# EAGLE board DSP HUB75 and Audio (EAGLE 9.6.2)

Size 160 x 100 mm. Coordinates in mm from the lower left corner, seen from the top.
Outline: 0,0 160,0 160,100 0,100 0,0
Copper layers (1*16): Top 0.035mm / dielectric 1.5mm / Bottom 0.035mm
Design rules "default": minimum track width 6mil, minimum drill 0.35mm, track to track 6mil, track to pad 6mil, pad to pad 6mil, via to via 6mil, smd to smd 6mil, copper to edge 40mil, drill to drill 6mil, minimum pad ring 10mil, minimum via ring 8mil, stop-mask expansion 4mil, vias tented up to drill 0mil, thermal gap 10mil
Net classes: 0 default: width 0.254 mm; 1 power: width 0.406 mm

## Footprints (pad centres in the part's own frame; a part is rotated, then mirrored left to right if it is on the bottom)
E1,8-4 = drill 0.711 pad 1.168: + -0.889,0 | drill 0.711 pad 1.168 octagon: - 0.889,0
2X08 = drill 1.016 square: 1 -8.89,-1.27 | drill 1.016 octagon: 2 -8.89,1.27; 3 -6.35,-1.27; 4 -6.35,1.27; 5 -3.81,-1.27; 6 -3.81,1.27; 7 -1.27,-1.27; 8 -1.27,1.27; 9 1.27,-1.27; 10 1.27,1.27; 11 3.81,-1.27; 12 3.81,1.27; 13 6.35,-1.27; 14 6.35,1.27; 15 8.89,-1.27; 16 8.89,1.27
0207/10 = drill 0.813 octagon: 1 -5.08,0; 2 5.08,0
TEENSY_3.0-3.2&LC_DIL = drill 0.965: 0 -7.62,13.97; 1 -7.62,11.43; 2 -7.62,8.89; 3 -7.62,6.35; 3.3V 7.62,11.43; 4 -7.62,3.81; 5 -7.62,1.27; 6 -7.62,-1.27; 7 -7.62,-3.81; 8 -7.62,-6.35; 9 -7.62,-8.89; 10 -7.62,-11.43; 11 -7.62,-13.97; 12 -7.62,-16.51; 13 7.62,-16.51; 14/A0 7.62,-13.97; 15/A1 7.62,-11.43; 16/A2 7.62,-8.89; 17/A3 7.62,-6.35; 18/A4 7.62,-3.81; 19/A5 7.62,-1.27; 20/A6 7.62,1.27; 21/A7 7.62,3.81; 22/A8 7.62,6.35; 23/A9 7.62,8.89; AGND 7.62,13.97; GND -7.62,16.51; VIN 7.62,16.51

## Placement (x,y rotation side)
C1  10uF  [E1,8-4]  63.5,39.37 0 top
C2  10uF  [E1,8-4]  53.34,30.48 90 top
JP4  [2X08]  35.56,17.78 180 top
R1  1k  [0207/10]  35.56,43.18 90 top
R2  47k  [0207/10]  64.77,30.48 90 top
R3  47k  [0207/10]  62.23,30.48 90 top
R4  10k  [0207/10]  59.69,30.48 90 top
R5  2.2k  [0207/10]  57.15,30.48 90 top
U$1  TEENSY_3.1-3.2_DIL  [TEENSY_3.0-3.2&LC_DIL]  35.56,41.91 0 top

## Library data of the parts
C1 C2 = rcl; SPICEPREFIX: C
JP4 = pinhead-2
R1-R5 = rcl; SPICEPREFIX: R
U$1 = Teensy_3_and_LC_Series_Boards_v1.4

## Nets
3.3V: U$1.3.3V
+3V3: R4.2 U$1.VIN
AGND: U$1.AGND
AUDIO_IN: C1.- R2.2
FFT: C1.+ R3.2 U$1.16/A2
GND [power]: C2.- JP4.4 JP4.8 JP4.16 R2.1 R5.1 U$1.GND
N$1: R1.2 U$1.3
N$2: C2.+ R3.1 R4.1 R5.2
PANEL_ADX0: JP4.9 U$1.9
PANEL_ADX1: JP4.10 U$1.10
PANEL_ADX2: JP4.11 U$1.22/A8
PANEL_ADX3: JP4.12 U$1.23/A9
PANEL_B1: JP4.3 U$1.6
PANEL_B2: JP4.7 U$1.20/A6
PANEL_CLK: JP4.13 U$1.14/A0
PANEL_G1: JP4.2 U$1.5
PANEL_G2: JP4.6 U$1.7
PANEL_LATCH: JP4.14 R1.1 U$1.8
PANEL_OE: JP4.15 U$1.4
PANEL_R1: JP4.1 U$1.2
PANEL_R2: JP4.5 U$1.21/A7

## Tracks (layer width: path | path; a pad name or v marks a point on that pad's centre or on a via)
+3V3  (1 unrouted)
AUDIO_IN  (1 unrouted)
FFT  (2 unrouted)
GND  (6 unrouted)
N$1  (1 unrouted)
N$2  (3 unrouted)
PANEL_ADX0  (1 unrouted)
PANEL_ADX1  (1 unrouted)
PANEL_ADX2  (1 unrouted)
PANEL_ADX3  (1 unrouted)
PANEL_B1  (1 unrouted)
PANEL_B2  (1 unrouted)
PANEL_CLK  (1 unrouted)
PANEL_G1  (1 unrouted)
PANEL_G2  (1 unrouted)
PANEL_LATCH  (2 unrouted)
PANEL_OE  (1 unrouted)
PANEL_R1  (1 unrouted)
PANEL_R2  (1 unrouted)